# EAGLE board potentiometer (EAGLE 6.2)
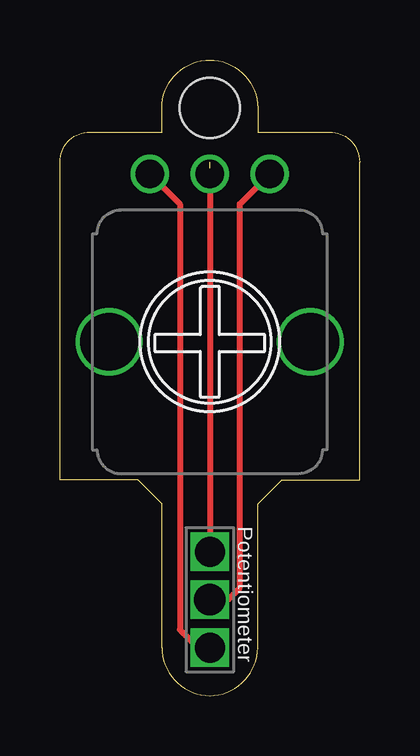
[diagram p0: board, top side]
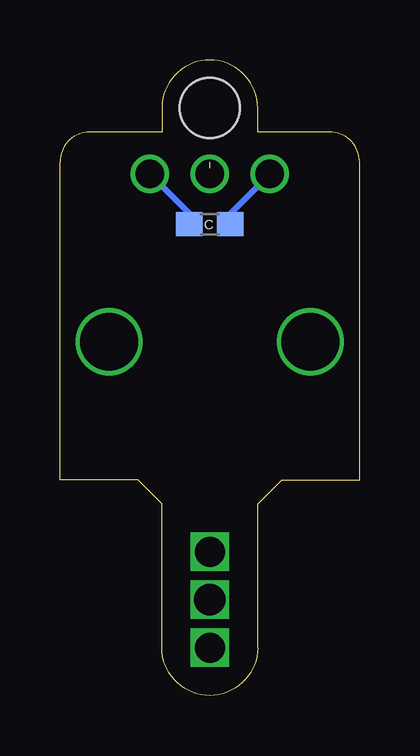
[diagram p1: board, bottom side, seen from below]

Size 12.5 x 26.5 mm. Coordinates in mm from the lower left corner, seen from the top.
Outline: 6.25,22 6.25,22.25
Outline: 4.25,2 arc90 6.25,0 arc90 8.25,2 8.25,8 9.25,9 12.5,9 12.5,22.25 arc90 11.25,23.5 8.25,23.5 8.25,24.5 arc90 6.25,26.5 arc90 4.25,24.5 4.25,23.5 1.25,23.5 arc90 0,22.25 0,9 3.25,9 4.25,8 4.25,2
Copper layers (1*16): Top 0.035mm / dielectric 1.5mm / Bottom 0.035mm
Design rules: minimum track width 10mil, minimum drill 24mil, track to track 8mil, track to pad 8mil, pad to pad 8mil, via to via 8mil, smd to smd 8mil, copper to edge 40mil, drill to drill 8mil, minimum pad ring 5mil, minimum via ring 8mil, stop-mask expansion 4mil, vias tented up to drill 0mil, thermal gap 10mil
Holes 2.5 mm at 6.25,24.5

## Footprints (pad centres in the part's own frame; a part is rotated, then mirrored left to right if it is on the bottom)
C0603 = smd 1.1 x 1: 1 -0.85,0; 2 0.85,0
POTENTIOMETER = drill 1.2 pad 1.6: P$1 -2.5,0; P$2 0,0; P$3 2.5,0 | drill 2.4 pad 2.8: P$4 -4.2,7; P$6 4.2,7
SENSOR_HEADER = drill 1.25 pad 1.6 square: 1 0,2; 3 0,-2 | drill 1.3 pad 1.6 square: 2 0,0

## Placement (x,y rotation side)
C  [C0603]  6.25,19.65 180 bottom
E$1  [POTENTIOMETER]  6.25,21.75 180 top
E$2  [SENSOR_HEADER]  6.25,4 0 top

## Library data of the parts
C = rcl
E$1 E$2 = appessory

## Nets
S$1: E$1.P$3 E$2.3
S$3: E$1.P$2 E$2.1
S$4: E$1.P$1 E$2.2

## Tracks (layer width: path | path; a pad name or v marks a point on that pad's centre or on a via)
S$1
  Top 0.254: E$1.P$3 5,20.5 5,2.75 5.75,2 E$2.3
  Bottom 0.254: E$1.P$3 5.75,19.75
S$3
  Top 0.254: E$1.P$2 E$2.1
S$4
  Top 0.254: E$2.2 7,4 7.5,4.5 7.5,20.5 E$1.P$1
  Bottom 0.254: E$1.P$1 6.75,19.75

## Text on the board
tPlace: Potentiometer